# EAGLE board cuircut (EAGLE 9.5.1)
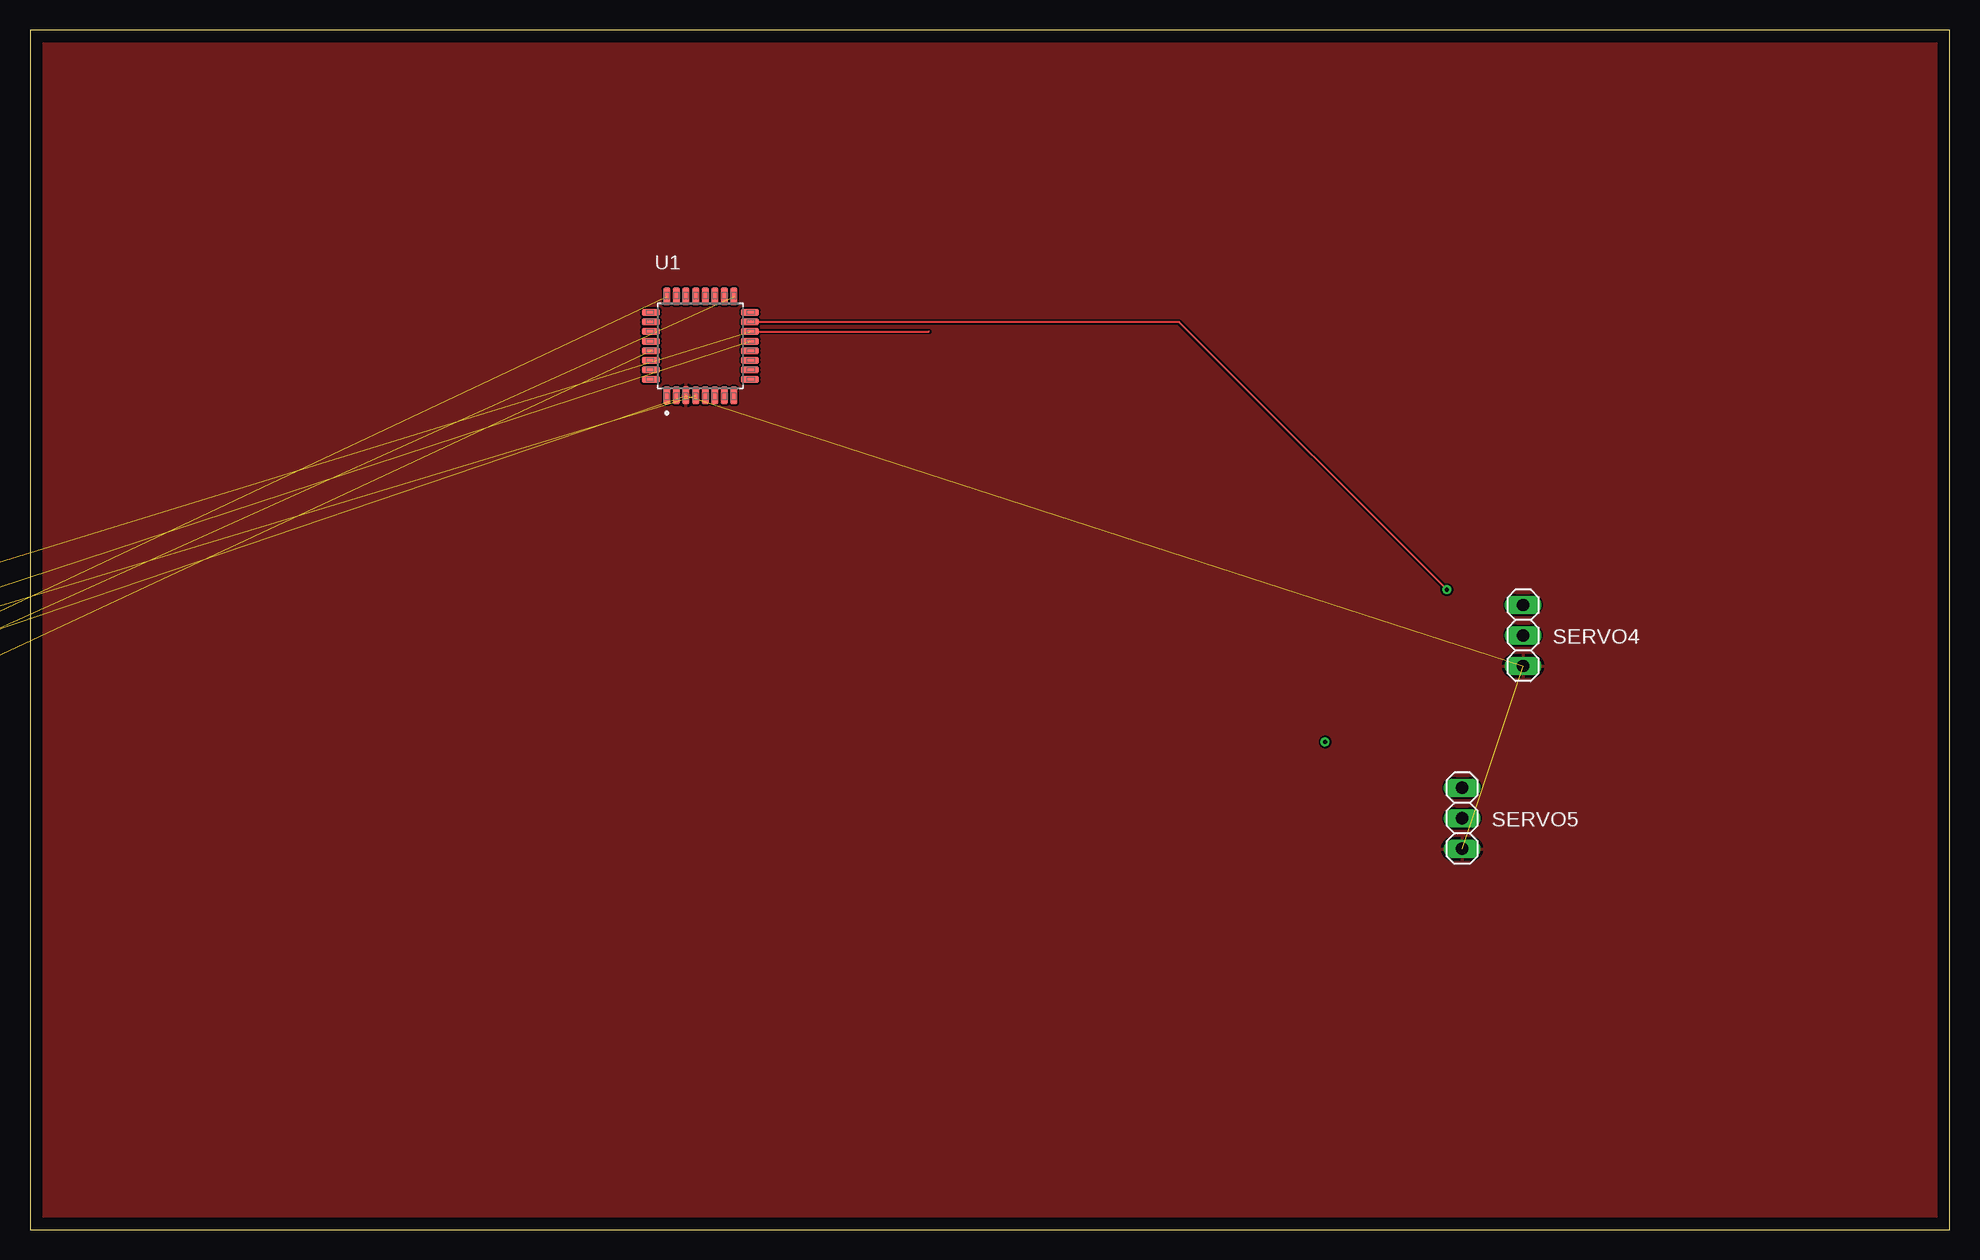
[diagram p0: board, top side]
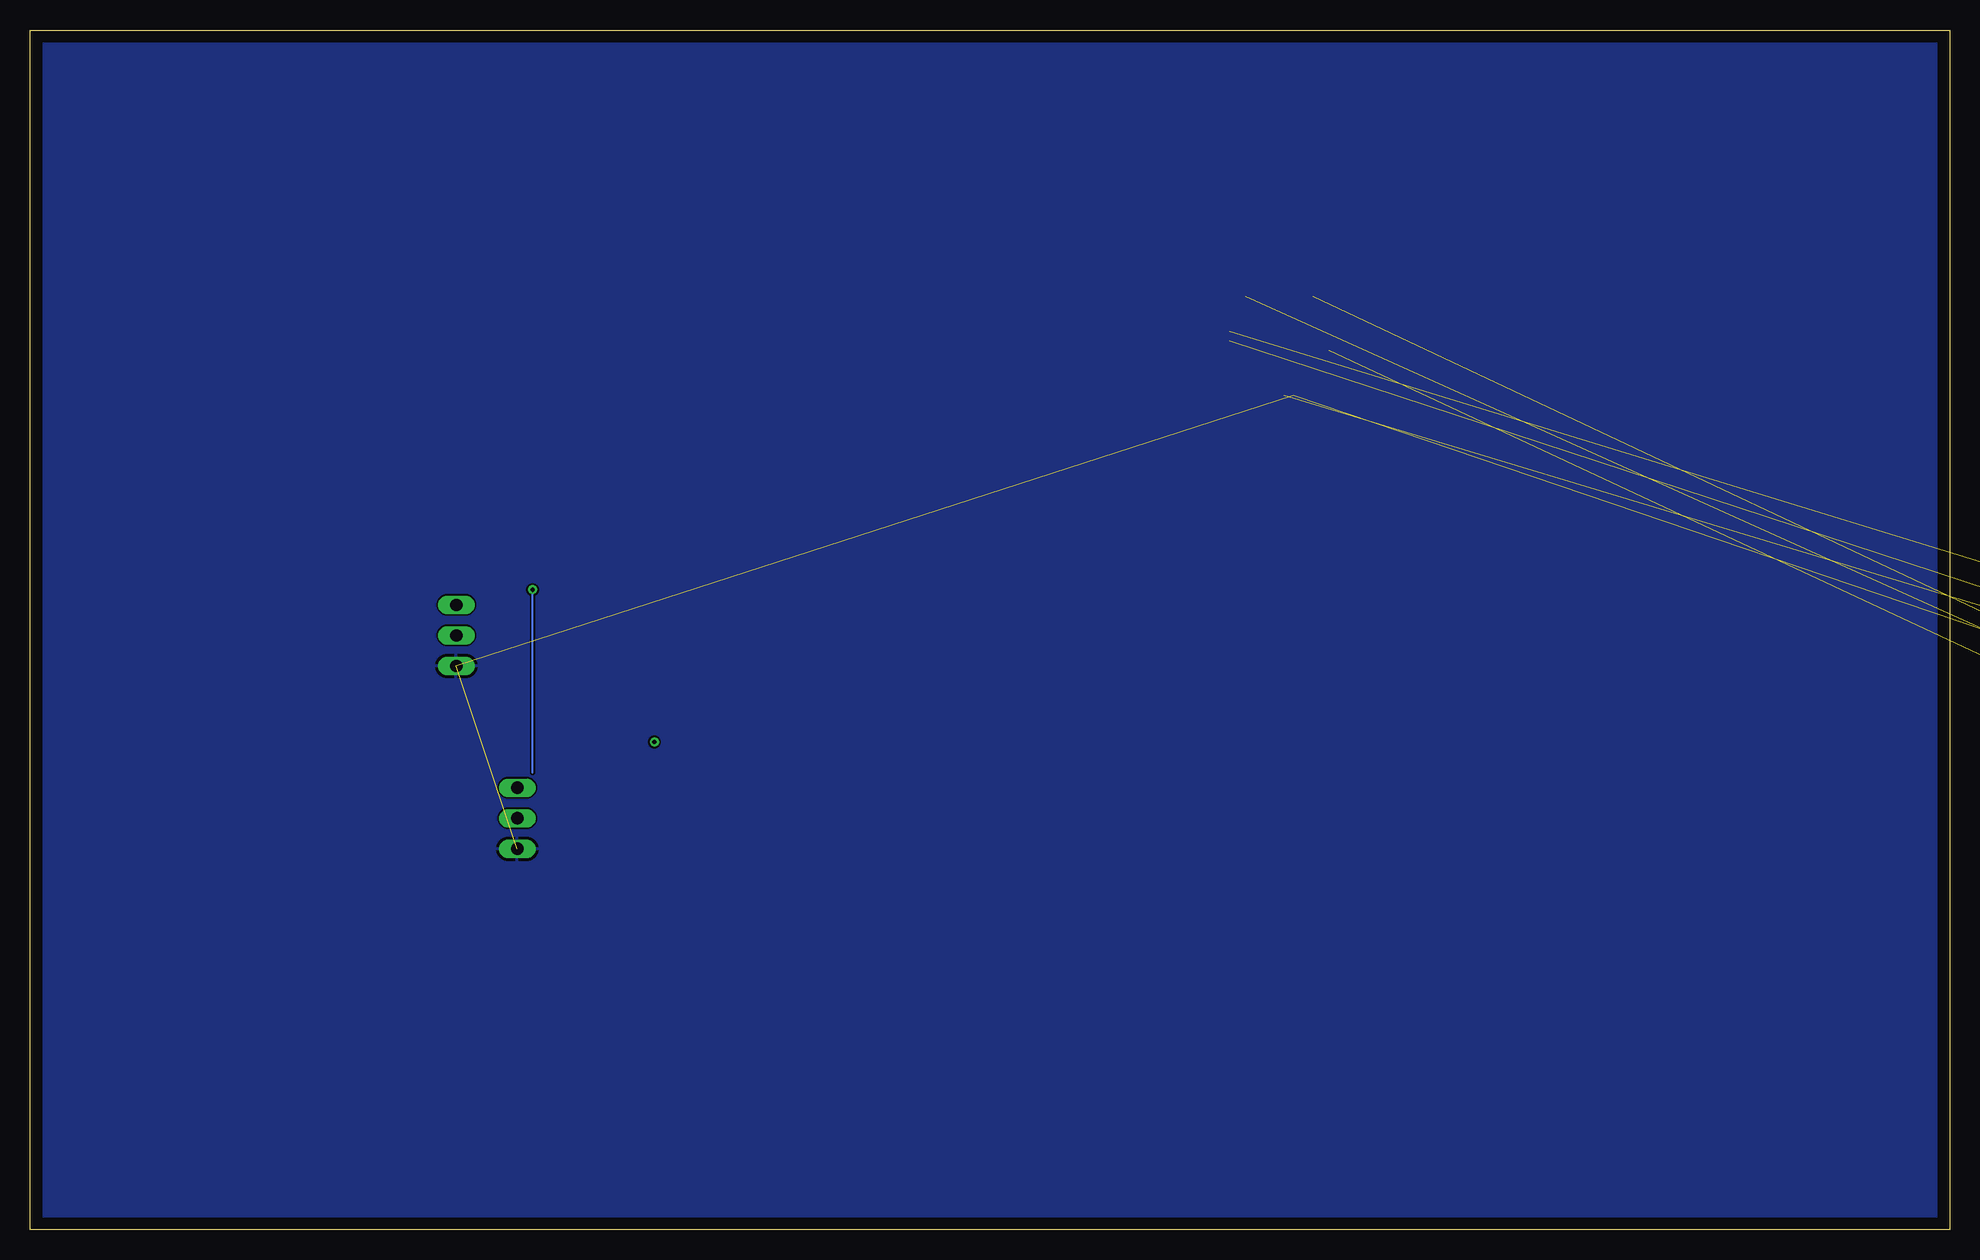
[diagram p1: board, bottom side, seen from below]

Size 160 x 100 mm. Coordinates in mm from the lower left corner, seen from the top.
Outline: 0,0 160,0 160,100 0,100 0,0
Copper layers (1*16): Top 0.035mm / dielectric 1.5mm / Bottom 0.035mm
Design rules "default": minimum track width 6mil, minimum drill 0.35mm, track to track 6mil, track to pad 6mil, pad to pad 6mil, via to via 6mil, smd to smd 6mil, copper to edge 40mil, drill to drill 6mil, minimum pad ring 10mil, minimum via ring 8mil, stop-mask expansion 4mil, vias tented up to drill 0mil, thermal gap 10mil

## Footprints (pad centres in the part's own frame; a part is rotated, then mirrored left to right if it is on the bottom)
BATTERY = drill 1.016 long: + 9.525,-5.08; +@1 9.525,5.08; - -5.715,0
C0805 = smd 1.3 x 1.5: 1 -0.95,0; 2 0.95,0
TO220V = drill 1.016 long: 1 -2.54,-2.54; 2 0,-2.54; 3 2.54,-2.54
DRC-S-PVSON-N10 = smd 0.28 x 0.85: 1 -1,-1.475; 2 -0.5,-1.475; 3 0,-1.475; 4 0.5,-1.475; 5 1,-1.475; 6 1,1.475; 7 0.5,1.475; 8 0,1.475; 9 -0.5,1.475; 10 -1,1.475 | smd 2.4 x 1.65: TH 0,0
1X03 = drill 1.016 long: 1 -2.54,0; 2 0,0; 3 2.54,0
TQFP-32 = smd 0.57 x 1.5: 1 -2.8,-4.13; 2 -2,-4.13; 3 -1.2,-4.13; 4 -0.4,-4.13; 5 0.4,-4.13; 6 1.2,-4.13; 7 2,-4.13; 8 2.8,-4.13; 17 2.8,4.13; 18 2,4.13; 19 1.2,4.13; 20 0.4,4.13; 21 -0.4,4.13; 22 -1.2,4.13; 23 -2,4.13; 24 -2.8,4.13 | smd 1.5 x 0.57: 9 4.13,-2.8; 10 4.13,-2; 11 4.13,-1.2; 12 4.13,-0.4; 13 4.13,0.4; 14 4.13,1.2; 15 4.13,2; 16 4.13,2.8; 25 -4.13,2.8; 26 -4.13,2; 27 -4.13,1.2; 28 -4.13,0.4; 29 -4.13,-0.4; 30 -4.13,-1.2; 31 -4.13,-2; 32 -4.13,-2.8
PN61729 = drill 0.95 octagon: 1 1.25,4.71; 2 -1.25,4.71; 3 -1.25,2.71; 4 1.25,2.71 | hole 2.3: -6.02,0; 6.02,0

## Placement (x,y rotation side)
BAT1  [BATTERY]  -25.4,12.7 0 top  (outside the outline)
C1  [C0805]  -34.29,48.26 0 top  (outside the outline)
IC1  786TV  [TO220V]  -34.29,33.02 0 top  (outside the outline)
IC2  BQ24022  [DRC-S-PVSON-N10]  -45.72,29.21 0 top  (outside the outline)
MYOELECTRIC  [1X03]  -22.86,43.18 0 top  (outside the outline)
SERVO1  [1X03]  -31.75,43.18 0 top  (outside the outline)
SERVO2  [1X03]  -40.64,43.18 0 top  (outside the outline)
SERVO3  [1X03]  -49.53,43.18 0 top  (outside the outline)
SERVO4  [1X03]  124.46,49.53 270 top
SERVO5  [1X03]  119.38,34.29 270 top
U1  ATMEGA328P-AU  [TQFP-32]  55.88,73.66 0 top
X1  [PN61729]  -44.45,11.43 0 top  (outside the outline)

## Library data of the parts
BAT1 = special
C1 = rcl; SPICEPREFIX: C
IC1 = linear
IC2 = texas
MYOELECTRIC SERVO1-SERVO5 = pinhead
U1 = Microcontroller; CREATED_BY: PCBLayout.com; DIGIKEY_PART_NUMBER: ATMEGA328P-AU-ND; MANUFACTURER: Microchip Technology; MPN: ATMEGA328P-AU; PACKAGE: TQFP-32
X1 = con-berg; OC_FARNELL: unknown; OC_NEWARK: unknown

## Nets
+: BAT1.+@1
AGND: BAT1.- C1.2 IC1.2 IC2.5 IC2.6 MYOELECTRIC.2 SERVO1.3 SERVO2.3 SERVO3.3 SERVO4.3 SERVO5.3 U1.3 X1.2
AREF: U1.20
AVCC: U1.18
GND1: U1.5
GND2: U1.21
N$1: BAT1.+ IC1.1 IC2.10
N$4: IC2.3 U1.29
N$5: IC2.8 U1.17
N$6: C1.1 IC2.2 X1.1
N$13: MYOELECTRIC.3 U1.24
N$17: U1.9
POWER: IC1.3 SERVO1.2 SERVO3.2 U1.4
SIGNAL1: SERVO1.1 U1.13
SIGNAL2: SERVO2.1 U1.14
SIGNAL3: U1.15
VCC1: U1.6

## Tracks (layer width: path | path; a pad name or v marks a point on that pad's centre or on a via)
AGND  (12 unrouted)
  pour Top: 0,100.33 160.02,100.33 160.02,0 0,0
  pour Bottom: 0,0 0,100.33 160.02,100.33 160.02,0
N$1  (2 unrouted)
N$2  (via drill 0.35)
  other vias: 107.95,40.64
N$4  (1 unrouted)
N$5  (1 unrouted)
N$6  (2 unrouted)
N$13  (1 unrouted)
POWER  (3 unrouted)
SIGNAL1  (1 unrouted)
SIGNAL2  (1 unrouted)
  Top 0.152: U1.14 74.93,74.86
SIGNAL3  (via drill 0.35)
  Top 0.152: v118.11,53.34 95.79,75.66 U1.15
  Bottom 0.152: 118.11,38.1 v118.11,53.34